# Altium PCB PCB1.PcbDoc
Units mm, origin at the board's own origin, x right, y up, seen from the top; angles counter-clockwise.
Board outline 178.5 x 80.5 mm, 2 copper layers (Top Layer, Bottom Layer); 17 components, 45 nets, 215 pads, 54 vias.
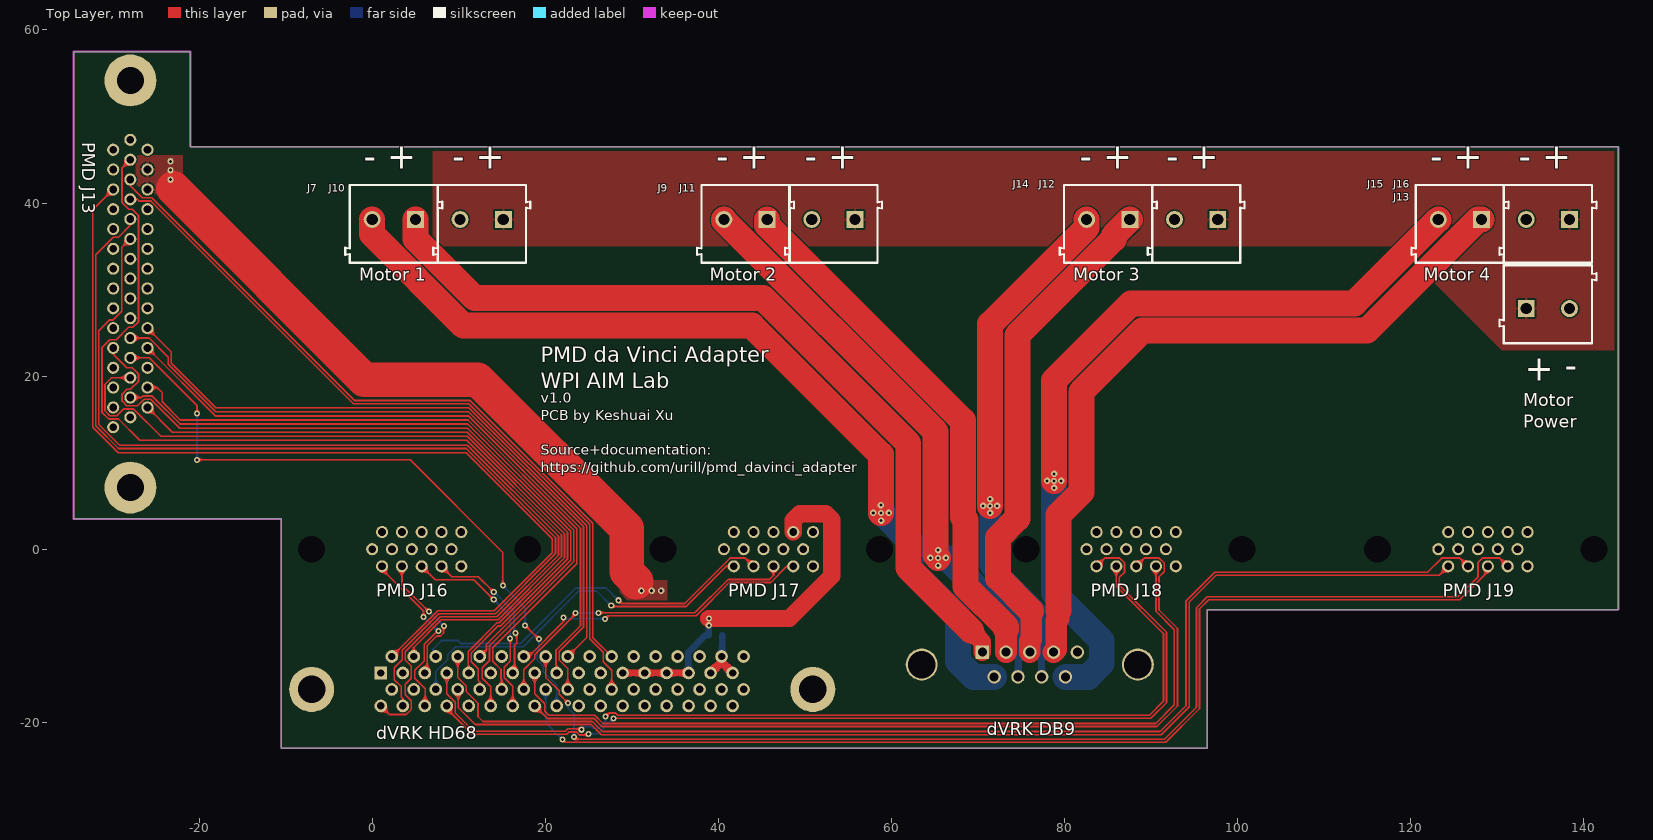
[diagram p0: Top Layer view]
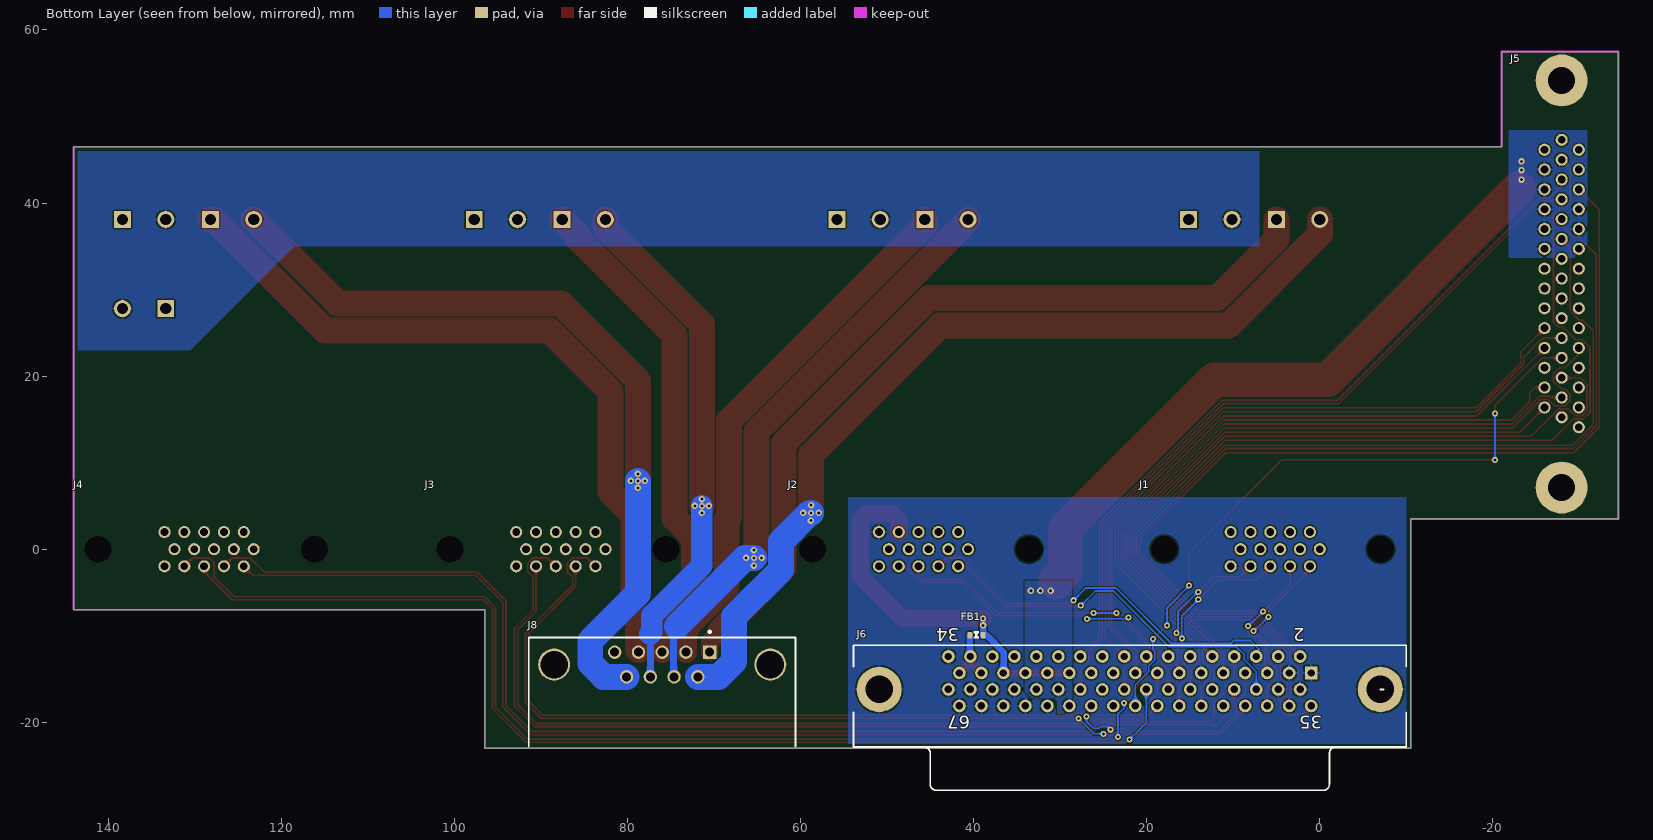
[diagram p1: Bottom Layer view, seen from below]
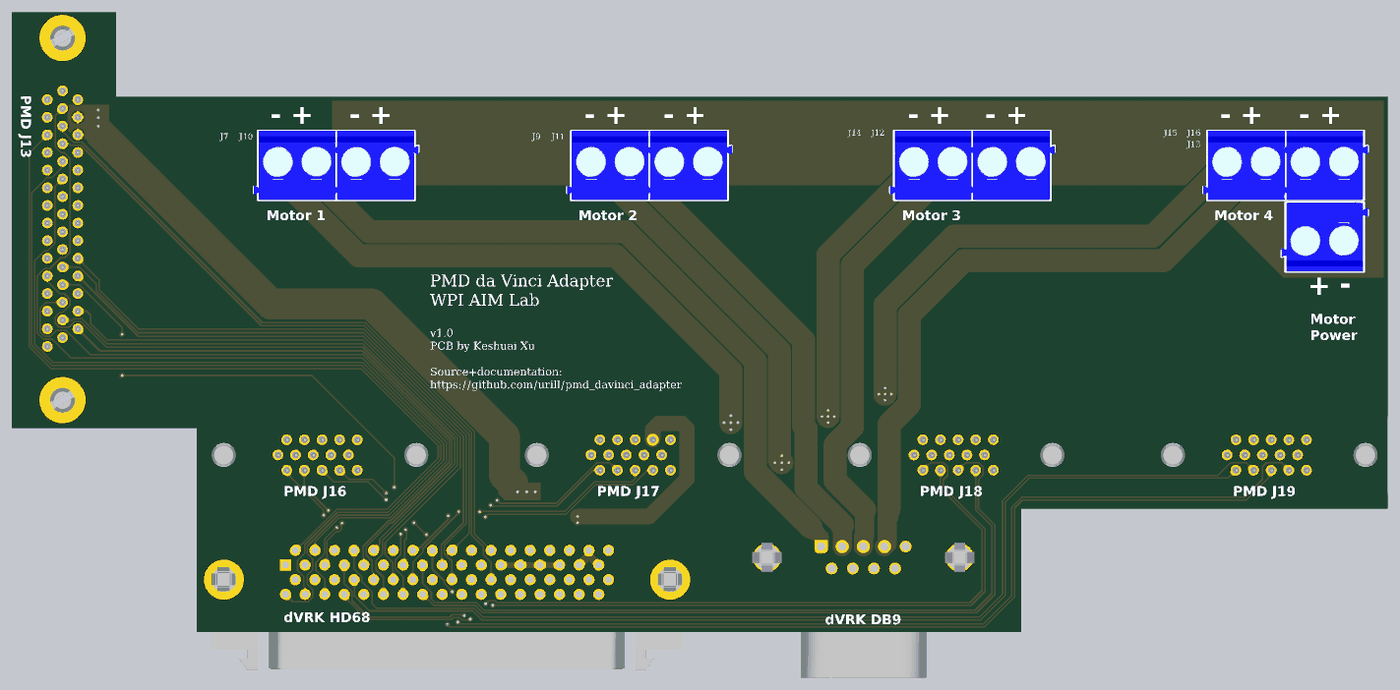
[diagram p2: 3D render of the assembled board from above, using the file's embedded part models]
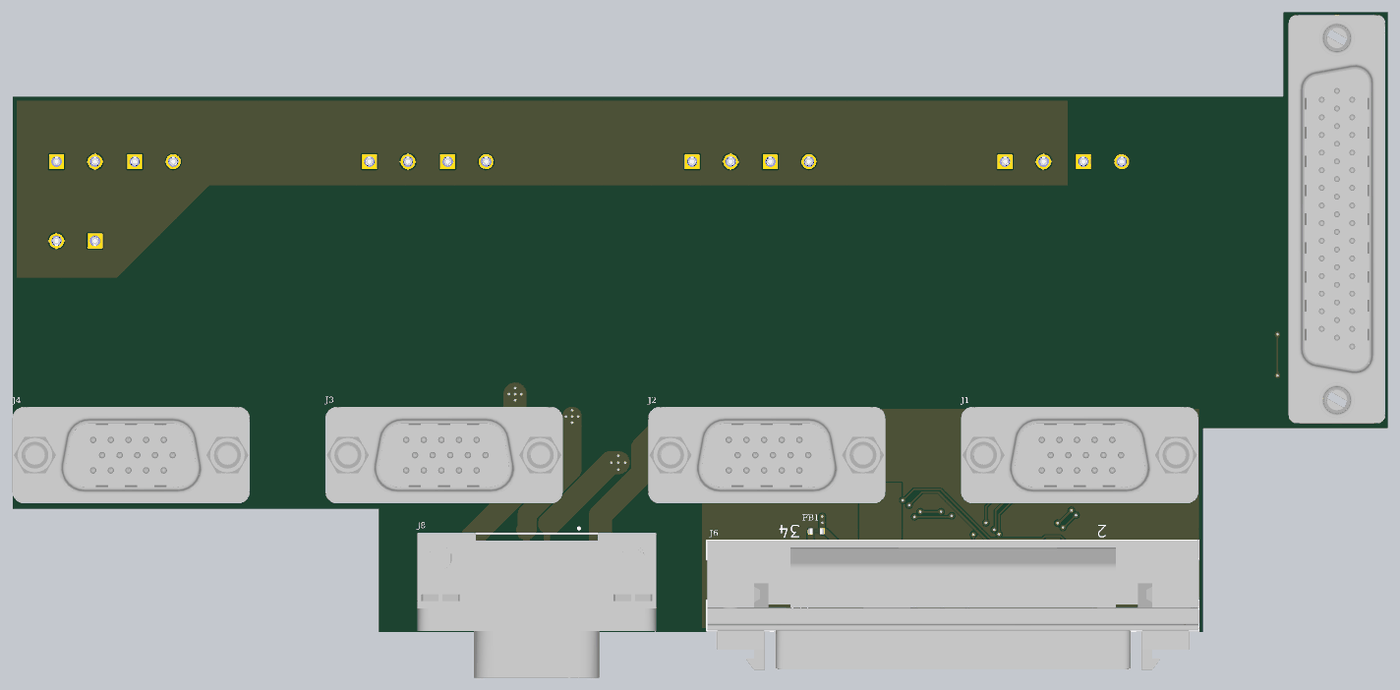
[diagram p3: 3D render of the assembled board from below, using the file's embedded part models]

## Layer stack, top to bottom
Top Solder: solder mask 0.0102, Solder Resist, Dk 3.5
Top Layer: signal copper 0.0356
Dielectric 1: dielectric 0.32, FR-4, Dk 4.8
Bottom Layer: signal copper 0.0356
Bottom Solder: solder mask 0.0102, Solder Resist, Dk 3.5

## Board outline
-34.5,3.5 -34.5,57.5 -21,57.5 -21,46.5 144,46.5 144,-7 96.5,-7 96.5,-23 -10.5,-23 -10.5,3.5

## Design rules (kind name [scope] priority, off if disabled: settings)
BoardOutlineClearance [InNetClass('All Nets')] p1: gap=0.381 ignorepadtopadclearanceinfootprint=FALSE
Clearance BoardEdge [All vs OnLayer('Keep-Out Layer')] p1: gap=0.4 ignorepadtopadclearanceinfootprint=FALSE
Clearance "Stitching GND" [IsStitchingVia and InNet('GND') vs (IsVia and (Not IsStitchingVia)) Or IsPad] p2 off: gap=0.127 ignorepadtopadclearanceinfootprint=FALSE except(0: Arc-Hole Track-Hole SMDPad-Hole THPad-Hole Via-Hole Fill-Hole Poly-Hole Region-Hole Text-Hole)
Clearance Clearance_outlinepolygon [inPolygon vs OnLayer('Keep-Out Layer')] p3 off: gap=0.4 ignorepadtopadclearanceinfootprint=FALSE except(0: Arc-Hole Track-Hole SMDPad-Hole THPad-Hole Via-Hole Fill-Hole Poly-Hole Region-Hole Text-Hole)
Clearance Clearance-polygonpolygon [InPolygon vs InPolygon] p4 off: gap=0.5 ignorepadtopadclearanceinfootprint=FALSE except(0: Arc-Hole Track-Hole SMDPad-Hole THPad-Hole Via-Hole Fill-Hole Poly-Hole Region-Hole Text-Hole)
Clearance Clearance_2 [All] p5: gap=0.152 ignorepadtopadclearanceinfootprint=FALSE except(0: Arc-Hole Track-Hole SMDPad-Hole THPad-Hole Via-Hole Fill-Hole Poly-Hole Region-Hole Text-Hole)
ComponentClearance [InComponentClass('no-clearance-check')] p1: gap=-999 collisioncheckmode=3 verticalgap=-999 showdistances=FALSE
ComponentClearance ComponentClearance_4 [All] p2: gap=0.254 collisioncheckmode=3 verticalgap=0.254 showdistances=FALSE
HoleSize [All] p1: absolutevalues=TRUE maxlimit=6 minlimit=0.33 maxpercent=80.000 minpercent=20.000
MinimumAnnularRing ignore [(HasFootprint('LMZ21701SIL') OR HasFootprint('m3 hole') OR HasFootprint('G3T-12AH'))] p1: minimumring=0
MinimumAnnularRing [All] p2: minimumring=0.152
MinimumSolderMaskSliver [All] p1: minsoldermaskwidth=0.076
NetAntennae [All] p1: netantennaetolerance=2
PolygonConnect PolygonConnect_heat [IsVia OR InPolygonClass('nothermalrelief') OR InPadClass('heatsink')] p1: connectstyle=Direct reliefconductorwidth=0.254 reliefentries=4 polygonreliefangle="90 Angle" airgapwidth=0.254
PolygonConnect [All] p2: connectstyle=Relief reliefconductorwidth=0.3 reliefentries=4 polygonreliefangle="90 Angle" airgapwidth=0.2
RoutingVias [All] p1: holewidth=0.35 width=0.7 viastyle="Through Hole" minholewidth=0.3 minwidth=0.7 maxholewidth=6 maxwidth=6 viatemplateguid#1={ECAECEE0-98E7-41BA-9EC3-9AF7EEB56C01} viatemplatename#1=signal
SilkToSilkClearance [All] p1 off: silktosilkclearance=0
SilkToSolderMaskClearance SilkToSolderMaskClearance_1 [HasFootprint('PAD-JUMPER-2-NO_YES_SILK')] p1: minsilkscreentomaskgap=0 clearancetoexposedcopper=TRUE
SilkToSolderMaskClearance [IsPad] p2: minsilkscreentomaskgap=0.15 clearancetoexposedcopper=TRUE
SolderMaskExpansion [All] p1: expansion=0.076
Width [All] p1: maxlimit=25.375 minlimit=0.152 preferedwidth=0.2
24 further rules are at their usual default settings.

## Classes and differential pairs
component class no-clearance-check: J7 J9 J10 J11 J12 J13 J14 J15

## Components (designator, comment, footprint, x,y, rotation, side; value= is the part's Value field where it differs from the comment)
FB1 "Ferrite Bead" IND_0603 39.675,-9.925 r180 bottom
J1 "DB15 connector vertical male" 10090928-P154XLF 5.475,0 r0 bottom locked
J2 "DB15 connector vertical male" 10090928-P154XLF 46.115,0 r0 bottom locked
J3 "DB15 connector vertical male" 10090928-P154XLF 88.025,0 r0 bottom locked
J4 "DB15 connector vertical male" 10090928-P154XLF 128.665,0 r0 bottom locked
J5 "DB44 connector vertical male" 10090928-P444XLF -27.94,30.64 r270 bottom locked
J6 "787928-7" 787928-7 21.955,-22.855 r0 bottom locked
J7 "691101710002" 691101710002 2.5,37.6 r180 top
J8 "5747844-4" TE-5747844-4_V 75.986,-13.322 r0 bottom locked
J9 "691101710002" 691101710002 43.14,37.6 r180 top
J10 "691101710002" 691101710002 12.66,37.6 r180 top
J11 "691101710002" 691101710002 53.3,37.6 r180 top
J12 "691101710002" 691101710002 95.21,37.6 r180 top
J13 "691101710002" 691101710002 135.85,28.3 r0 top
J14 "691101710002" 691101710002 85.05,37.6 r180 top
J15 "691101710002" 691101710002 125.69,37.6 r180 top
J16 "691101710002" 691101710002 135.85,37.6 r180 top

## Footprints (in the part's own frame and the unit in brackets; to place one, negate y for a bottom-side part, rotate by r counter-clockwise, add the part's x,y. Pads: shape width x height; smd on the part's side, far side on the other; paste and mask are expansions set on the pad)
787928-7 [mm] "Connector; D Subminiature 050 Series; 68 Position; Right Angle"
  rect 1.46x1.46 hole 0.86: 1(-20.955,-8.555)
  round 1.46 hole 0.86: 2(-19.685,-10.46) 3(-18.415,-8.555) 4(-17.145,-10.46) 5(-15.875,-8.555) 6(-14.605,-10.46) 7(-13.335,-8.555) 8(-12.065,-10.46) 9(-10.795,-8.555) 10(-9.525,-10.46) 11(-8.255,-8.555) 12(-6.985,-10.46) 13(-5.715,-8.555) 14(-4.445,-10.46) 15(-3.175,-8.555) 16(-1.905,-10.46) 17(-0.635,-8.555) 18(0.635,-10.46) 19(1.905,-8.555) 20(3.175,-10.46) 21(4.445,-8.555) 22(5.715,-10.46) 23(6.985,-8.555) 24(8.255,-10.46) 25(9.525,-8.555) 26(10.795,-10.46) 27(12.065,-8.555) 28(13.335,-10.46) 29(14.605,-8.555) 30(15.875,-10.46) 31(17.145,-8.555) 32(18.415,-10.46) 33(19.685,-8.555) 34(20.955,-10.46) 35(-20.955,-4.745) 36(-19.685,-6.65) 37(-18.415,-4.745) 38(-17.145,-6.65) 39(-15.875,-4.745) 40(-14.605,-6.65) 41(-13.335,-4.745) 42(-12.065,-6.65) 43(-10.795,-4.745) 44(-9.525,-6.65) 45(-8.255,-4.745) 46(-6.985,-6.65) 47(-5.715,-4.745) 48(-4.445,-6.65) 49(-3.175,-4.745) 50(-1.905,-6.65) 51(-0.635,-4.745) 52(0.635,-6.65) 53(1.905,-4.745) 54(3.175,-6.65) 55(4.445,-4.745) 56(5.715,-6.65) 57(6.985,-4.745) 58(8.255,-6.65) 59(9.525,-4.745) 60(10.795,-6.65) 61(12.065,-4.745) 62(13.335,-6.65) 63(14.605,-4.745) 64(15.875,-6.65) 65(17.145,-4.745) 66(18.415,-6.65) 67(19.685,-4.745) 68(20.955,-6.65)
  round 5.2 hole 3.18: 69(-28.955,-6.65) 70(28.955,-6.65)
  silkscreen extent -31.94,-11.76 31.94,5, body extent -31.99,-11.79 31.89,5.08, height 10.24
10090928-P154XLF [mm]
  round 0 hole 3.1 unplated: 0(-12.495,0) 0(12.495,0)
  round 1.4 hole 0.9: 1(-4.33,1.98) 2(-2.04,1.98) 3(0.25,1.98) 4(2.54,1.98) 5(4.83,1.98) 6(-5.475,0) 7(-3.185,0) 8(-0.895,0) 9(1.395,0) 10(3.685,0) 11(-4.33,-1.98) 12(-2.04,-1.98) 13(0.25,-1.98) 14(2.54,-1.98) 15(4.83,-1.98)
  body extent -15.42,-6.25 15.4,6.3, height 12.05
10090928-P444XLF [mm]
  round 6 hole 3.1: 0(-23.52,0) 0(23.52,0)
  round 1.4 hole 0.9: 1(-15.515,1.98) 2(-13.225,1.98) 3(-10.935,1.98) 4(-8.645,1.98) 5(-6.355,1.98) 6(-4.065,1.98) 7(-1.775,1.98) 8(0.515,1.98) 9(2.805,1.98) 10(5.095,1.98) 11(7.385,1.98) 12(9.675,1.98) 13(11.965,1.98) 14(14.255,1.98) 15(16.545,1.98) 16(-16.66,0) 17(-14.37,0) 18(-12.08,0) 19(-9.79,0) 20(-7.5,0) 21(-5.21,0) 22(-2.92,0) 23(-0.63,0) 24(1.66,0) 25(3.95,0) 26(6.24,0) 27(8.53,0) 28(10.82,0) 29(13.11,0) 30(15.4,0) 31(-15.515,-1.98) 32(-13.225,-1.98) 33(-10.935,-1.98) 34(-8.645,-1.98) 35(-6.355,-1.98) 36(-4.065,-1.98) 37(-1.775,-1.98) 38(0.515,-1.98) 39(2.805,-1.98) 40(5.095,-1.98) 41(7.385,-1.98) 42(9.675,-1.98) 43(11.965,-1.98) 44(14.255,-1.98)
  body extent -26.49,-6.28 26.51,6.27, height 11.85
691101710002 [mm] "5,00mm - modular - blue - Horizontal entry with pressure clamp - 12,6mm height - 02p"
  rect 1.95x1.95 hole 1.3: 1(-2.5,-0.5)
  round 1.95 hole 1.3: 2(2.5,-0.5)
  silkscreen extent -5.6,-4.5 5.6,4.5, body extent -5.6,-4.5 5.6,4.5, height 12.65
IND_0603 [mil]
  rrect50% 22x30 smd: 1(-30,0) 2(30,0)
  silkscreen extent -10,-15 10,15, body extent -31,-16 31,16, height 31
TE-5747844-4_V [mil] "TH, 9-Leads, Body 30.81x18.796mm, Pitch 1.3716mm"
  rect 61.02x61.02 hole 41: 1(-216,-56)
  round 61.02 hole 41: 2(-108,-56) 3(0,-56) 4(108,-56) 5(216,-56) 6(-162,56) 7(-54,56) 8(54,56) 9(162,56)
  round 144.69 hole 125: MH1(-492,0) MH2(492,0)
  silkscreen extent -606,-153 607,374, body extent -610,-125 610,618, height 494

## Part data
FB1: library part "Ferrite Chip", "SMT Ferrite Chip"
J1 J2 J3 J4: library part PMD-sensor
J5: library part PMD-GPIO
J6: "Receptacle Assembly, Shielded, Right Angle, AMPLIMITE", PackageDocument=13-Jan-2000, ComponentLink1Description="Manufacturer Link", ComponentLink1URL=http://www.tycoelectronics.com/, ComponentLink2Description="Packaging Specification", ComponentLink2URL=http://ecommas.tycoelectronics.com/commerce/DocumentDelivery/DDEController?Action=showdoc&DocId=Customer+Drawing%7F787928%7FE%7Fpdf%7FEnglish%7FENG_CD_787928_E.pdf, ComponentLink3Description="URL Link1", ComponentLink3URL=http://catalog.tycoelectronics.com/TE/docs/cadgeo/2/25/41522.tar.gz, DatasheetDocument=13-Jan-2000, DrillSize="Corresponds to nominal value.", Gender="Receptacle Header", Note="Series III", Orientation="Right Angle", PackageReference=787928-7, PCB_Layout="Complies with manufacturer's recommendation.", Positions=68, Published=17-Jul-2002, Publisher="Altium Limited"
J7 J9 J10 J11 J12 J13 J14 J15 J16: "WR-TBL Serie 101 - 5.00 mm Horizontal Entry Modular, 02p", ComponentLink1Description=Manufacturer, ComponentLink1URL=http://www.we-online.de, ComponentLink2Description=Datasheet, ComponentLink2URL=http://katalog.we-online.de/em/datasheet/6911017100xx.pdf, Part Number=691101710002, Pin Number=02p, Pitch="5 mm", Published Date="Feb. 2017", Publisher="Wurth Elektronik"
  J7 J9 J10 J11 J12 J13 J14 J15: ClassName=no-clearance-check
  J16: ComponentClass=no-clearance-check
J8: library part CMP-1684-00001-6, "Female D-Sub Receptacle, Pitch 1.3716 mm, 9 Position, Height 12.9286 mm, -55 to 105 degC, RoHS, Tray", Colour=Black, Current Rating="6 A", Manufacturer="TE Connectivity", Max Operating Temperature="105 degC", Min Operating Temperature="-55 degC", Package Quantity=130, Voltage Rating="125 V", ComponentLink1Description="Manufacturer URL", ComponentLink1URL=http://www.te.com/, ComponentLink2Description=Datasheet, ComponentLink2URL=http://www.te.com/commerce/DocumentDelivery/DDEController?Action=srchrtrv&DocNm=5747844&DocType=Customer+Drawing&DocLang=English, Contact Finish=Gold, Contact Material=Bronze, Contact Plating=Gold, DatasheetVersion="Rev. P, 03/2011", Height="12.54 mm", Lead Pitch="2.74 mm", Length="30.81 mm", Mount="Through Hole", Mounting Technology="Through Hole", PackageDescription="Female D-Sub Receptacle, Pitch 1.3716 mm, 9 Position, Height 12.9286 mm", PackageReference=5747844-4, Packaging=Tray, Pins=9, REACH SVHC="No SVHC", RoHSCompliant=true, Rows=2

## Via types
v1: diameter 0.7, hole 0.35, Top Layer to Bottom Layer, tented both sides, 31 vias
v2: diameter 0.75, hole 0.35, Top Layer to Bottom Layer, tented both sides, 23 vias

## Nets (pads, with @x,y where several pads share a name; then routed paths per layer and width w, separated by ;. In a path a pad name is that pad's centre, name@x,y a point inside that pad or via, vN(x,y) a via of type N, cw(c..) or ccw(c..) an arc to the next point about the centre after c; other vN are vias at no path point)
AGND: J5.4 J5.5 J5.32 J5.33 J5.34 J5.35 J5.36 J6.57 J6.58 J6.60 | length 75.3
  Top Layer w4: -23,41.7 -0.9,19.6 12.2,19.6 29.4,2.4 29.4,-2.6 30.5,-3.7 30.5,-3.8
  other v2: 31.1,-4.8 32.3,-4.8 33.4,-4.8 -23.3,42.7 -23.3,43.8 -23.3,44.8
ENCA+1: J1.1 J6.39 | length 20.6
  Top Layer w0.2: J1.1 1.145,-2.345 5.925,-7.125 5.925,-7.8 v1(5.95,-7.825) ; J6.39 6.125,-18.065 6.125,-16.131 4.925,-14.931 4.925,-14 6.015,-12.91 6.015,-10.986 7.577,-9.425 v1(7.65,-9.425)
  Bottom Layer w0.2: v1(5.95,-7.825) 7.55,-9.425 v1(7.65,-9.425)
ENCA+2: J2.1 J6.40 | length 43.4
  Top Layer w0.2: v1(27.625,-6.525) 27.727,-6.627 36.248,-6.627 40.895,-1.98 J2.1
  Bottom Layer w0.2: J6.40 7.35,-14.125 8.725,-12.75 8.725,-12.171 9.639,-11.257 17.443,-11.257 23.875,-4.825 25.925,-4.825 v1(27.625,-6.525)
ENCA+3: J3.1 J6.41 | length 109
  Top Layer w0.2: J6.41 8.62,-18.448 11.56,-21.387 22.489,-21.387 22.766,-21.11 23.585,-21.11 23.935,-21.461 24.841,-21.461 v1(24.974,-21.327) ; v1(27.892,-19.536) 27.894,-19.538 89.96,-19.538 91.775,-17.724 91.775,-9.589 86.337,-4.152 86.337,-3.247 86.937,-2.647 86.937,-1.586 86.379,-1.028 84.647,-1.028 J3.1
  Bottom Layer w0.2: v1(24.974,-21.327) 26.101,-21.327 v1(27.892,-19.536)
ENCA+4: J4.1 J6.42 | length 132.9
  Top Layer w0.2: J6.42 9.955,-16.27 9.955,-18.294 11.916,-20.256 25.295,-20.256 26.467,-21.427 91.173,-21.427 94.4,-18.2 94.4,-6.1 97.5,-3 123.315,-3 J4.1
ENCA-1: J1.2 J6.5 | length 15.7
  Top Layer w0.2: J1.2 3.435,-4.085 v1(6.55,-7.2) ; J6.5 6.368,-14.012 6.368,-11.132 7.473,-10.027 7.9,-10.027 8.252,-9.675 8.252,-9.175 8.126,-9.049 v1(8.325,-8.85)
  Bottom Layer w0.2: v1(6.55,-7.2) 8.2,-8.85 v1(8.325,-8.85)
ENCA-2: J2.2 J6.6 | length 44.6
  Top Layer w0.2: v1(28.45,-5.9) 28.825,-6.275 36.102,-6.275 41.349,-1.028 43.123,-1.028 J2.2
  Bottom Layer w0.2: J6.6 7.35,-11.95 6.986,-11.586 8.021,-10.55 9.95,-10.55 10.305,-10.905 17.12,-10.905 23.552,-4.473 27.023,-4.473 v1(28.45,-5.9)
ENCA-3: J3.2 J6.7 | length 107.8
  Top Layer w0.2: J6.7 8.62,-16.721 9.602,-17.703 9.602,-18.932 11.706,-21.035 22.343,-21.035 22.62,-20.758 24.084,-20.758 v1(24.184,-20.858) ; v1(26.974,-19.327) 27.366,-18.934 28.142,-18.934 28.394,-19.186 89.814,-19.186 91.422,-17.578 91.422,-9.735 85.985,-4.298 J3.2
  Bottom Layer w0.2: v1(24.184,-20.858) 24.209,-20.858 24.587,-20.479 25.297,-20.479 25.514,-20.697 26.151,-20.697 26.974,-19.875 v1(26.974,-19.327)
ENCA-4: J4.2 J6.8 | length 138.8
  Top Layer w0.2: J6.8 9.89,-14.816 10.872,-15.798 10.872,-16.433 12.234,-17.794 12.234,-19.33 12.807,-19.903 25.441,-19.903 26.613,-21.075 91.027,-21.075 94.048,-18.054 94.048,-5.952 97.352,-2.648 121.946,-2.648 123.566,-1.028 125.673,-1.028 J4.2
ENCB+1: J1.3 J6.47 | length 23.9
  Top Layer w0.2: J1.3@5.944,-1.98 J1.3 7.27,-3.525 11.75,-3.525 v1(14.05,-5.825) ; v1(15.952,-10.302) 15.952,-12.923 15.25,-13.625 15.25,-14.85 16.24,-15.84 J6.47
  Bottom Layer w0.2: v1(14.05,-5.825) 15.952,-7.727 v1(15.952,-10.302)
ENCB+2: J2.3 J6.48 | length 37
  Top Layer w0.2: J6.48 17.51,-13.915 18.8,-12.625 18.8,-12.175 23.475,-7.5 v1(23.475,-7.375) ; v1(26.175,-7.375) 26.202,-7.348 37.283,-7.348 41.13,-3.5 45.902,-3.5 46.365,-3.037 J2.3
  Bottom Layer w0.2: v1(23.475,-7.375) v1(26.175,-7.375)
ENCB+3: J3.3 J6.49 | length 97.8
  Top Layer w0.2: J6.49 20.221,-19.551 25.587,-19.551 26.527,-20.491 90.67,-20.491 93.047,-18.114 93.047,-9.154 90.917,-7.024 90.917,-3.194 91.517,-2.594 91.517,-1.586 90.959,-1.028 89.227,-1.028 J3.3
ENCB+4: J4.3 J6.50 | length 129.6
  Top Layer w0.2: J6.50 J6.50@20.28,-16.435 ; v1(22,-22) 22.315,-22.315 91.685,-22.315 95.6,-18.4 95.6,-6.9 96.648,-5.852 125.648,-5.852 128.915,-2.585 J4.3
  Bottom Layer w0.2: J6.50@20.121,-16.276 J6.50 20.05,-20.05 v1(22,-22)
ENCB-1: J1.4 J6.13 | length 17.9
  Top Layer w0.2: J1.4 9.208,-3.173 12.273,-3.173 v1(14.051,-4.95) ; J6.13 16.452,-14.088 16.452,-11.1 16.702,-10.85 16.702,-9.827 v1(16.576,-9.7)
  Bottom Layer w0.2: v1(14.051,-4.95) 14.126,-4.95 16.4,-7.225 16.4,-9.525 v1(16.576,-9.7)
ENCB-2: J2.4 J6.14 | length 35.9
  Top Layer w0.2: J6.14 18.082,-12.395 22.1,-8.377 v1(22.1,-7.9) ; v1(26.925,-8.05) 27.275,-7.7 37.429,-7.7 41.276,-3.852 46.048,-3.852 47.92,-1.98 J2.4
  Bottom Layer w0.2: v1(22.1,-7.9) 22.25,-8.05 v1(26.925,-8.05)
ENCB-3: J3.4 J6.15 | length 96
  Top Layer w0.2: J6.15 18.78,-16.721 19.928,-17.869 19.928,-18.742 20.384,-19.199 25.733,-19.199 26.673,-20.139 90.524,-20.139 92.685,-17.978 92.685,-9.29 90.565,-7.17 J3.4
ENCB-4: J4.4 J6.16 | length 135.4
  Top Layer w0.2: J6.16 20.05,-14.816 21.608,-16.373 21.608,-16.745 v1(22.628,-17.765) ; v1(23.335,-21.713) 23.572,-21.95 91.552,-21.95 95.248,-18.254 95.248,-6.752 96.5,-5.5 125.45,-5.5 127.782,-3.168 127.782,-1.518 128.272,-1.028 130.253,-1.028 J4.4
  Bottom Layer w0.2: v1(22.628,-17.765) 22.628,-18.374 23.335,-19.081 v1(23.335,-21.713)
ENCI+4: J5.19 J6.56 | length 88.8
  Top Layer w0.2: J5.19 -27.122,40.43 -26.929,40.237 -25.566,40.237 -2.151,16.823 11.179,16.823 25.135,2.867 25.135,-10.358 26.688,-11.911 26.688,-13 27.67,-13.982 J6.56
ENCI-4: J5.18 J6.22 | length 86.6
  Top Layer w0.2: J5.18 -27.94,41.992 -26.57,40.623 -25.452,40.623 -22.5,37.67 -2.005,17.175 11.325,17.175 25.487,3.013 25.487,-10.212 J6.22
GND: J2.15 J6.1 J6.3 J6.34 J6.36 J6.38 J6.59 J6.61 J6.62 J6.63 J6.64 J6.65 J6.66 J6.67 J6.68 J6.69 J6.70
GND_MOTOR: J10.2 J11.2 J12.2 J13.2 J16.2
HOME1: J5.41 J6.17 | length 76.6
  Top Layer w0.2: J5.41 -18.108,15.403 11.103,15.403 24.077,2.429 24.077,-8.823 21.255,-11.645 21.255,-13.373 21.32,-13.438 J6.17
HOME2: J5.40 J6.18 | length 77
  Top Layer w0.2: J5.40 -23.205,22.79 -23.205,21.497 -18.054,16.346 11.157,16.346 24.782,2.721 24.782,-10.203 J6.18
HOME3: J5.27 J6.51 | length 76.6
  Top Layer w0.2: J5.27 -25.758,22.11 -20.225,16.577 v1(-20.225,15.675) ; v1(-20.225,10.325) 4.4,10.325 15.1,-0.375 v1(15.1,-4.2) ; v1(17.65,-8.825) 17.7,-8.825 19.225,-10.35 v1(19.275,-10.35)
  Bottom Layer w0.2: v1(-20.225,10.325) v1(-20.225,15.675) ; v1(15.1,-4.2) 17.65,-6.75 v1(17.65,-8.825) ; v1(19.275,-10.35) 19.275,-11.54 19.068,-11.747 19.068,-12.802 19.762,-13.497 19.762,-14.132 21.32,-15.689 J6.51
HOME4: J5.26 J6.52 | length 82.3
  Top Layer w0.2: J5.26 -25.758,24.4 -23.557,22.199 -23.557,21.351 -18.081,15.875 11.13,15.875 24.43,2.575 24.43,-8.969 21.608,-11.791 21.608,-12.802 22.59,-13.784 J6.52
MOTOR+1: J7.1 J8.1 | length 96.7
  Top Layer w2: 69.2,-9.4 70.5,-10.7 J8.1
  Top Layer w3: J7.1 5,35.858 11.858,29 45.184,29 61.943,12.241 61.943,-2.143 69.2,-9.4
MOTOR+2: J8.2 J9.1 | length 61.4
  Top Layer w2.5: J8.2 73.243,-9.243
  Top Layer w3: J9.1 45.64,37.46 68.248,14.852 68.248,3.694 68.552,3.389 68.552,-4.294 73.243,-8.985 73.243,-9.243
MOTOR+3: J8.3 J14.1 | length 58
  Top Layer w2.5: J8.3 75.986,-10.605 76.146,-10.445 76.146,-7.141
  Top Layer w3: 76.146,-7.141 72.328,-3.323 72.328,1.326 74.552,3.551 74.552,24.694 85.702,35.844 85.702,36.252 J14.1
MOTOR+4: J8.4 J15.1 | length 85.9
  Top Layer w2.5: J8.4 79.048,-11.582 79.048,-8.252 79.3,-8 79.3,-7.1
  Top Layer w3: 79.3,-7.1 79.3,3.942 81.952,6.594 81.952,18.194 89.006,25.248 114.948,25.248 127.8,38.1 J15.1
MOTOR-1: J7.2 J8.6 | length 103.6
  Top Layer w3: J7.2 0,36.4 10.552,25.848 43.878,25.848 58.79,10.935 v2(58.79,5.1) v1(58.79,4.2)
  Bottom Layer w3: v1(58.79,4.2) 58.939,4.2 62.248,0.891 62.248,-2.348 67.7,-7.8 67.7,-12.987 69.458,-14.745 J8.6
  other v2: 58.8,3.3 57.9,4.2 59.7,4.2
MOTOR-2: J8.7 J9.2 | length 67.5
  Top Layer w3: J9.2 40.64,38.002 65.095,13.547 65.095,-0.695 v1(65.4,-1)
  Bottom Layer w0.8: 74.3,-8.9 74.659,-9.259 74.659,-14.701 J8.7
  Bottom Layer w3: v1(65.4,-1) v2(66.3,-1) 66.4,-1 74.3,-8.9
  other v2: 65.4,-1.9 64.5,-1 65.4,-0.1
MOTOR-3: J8.8 J14.2 | length 60
  Top Layer w3: v1(71.4,5) v2(71.4,5.8) 71.4,26 82.55,37.15 J14.2
  Bottom Layer w0.8: J8.8 77.358,-9.842 77.4,-9.8
  Bottom Layer w2.5: v1(71.4,5) v2(71.4,4.2) 71.4,-1.895 77.202,-7.698 77.202,-9.602 77.4,-9.8
  other v2: 70.6,5 72.2,5
MOTOR-4: J8.9 J15.2 | length 91.9
  Top Layer w3: v1(78.8,7.9) v2(78.8,8.7) 78.8,19.5 87.7,28.4 113.49,28.4 J15.2
  Bottom Layer w3: v1(78.8,7.9) v2(78.8,7.1) 78.8,-5.1 84.3,-10.6 84.3,-13.2 82.755,-14.745 J8.9
  other v2: 78,7.9 79.6,7.9
NEGLIM3: J5.29 J6.45 | length 82.8
  Top Layer w0.2: J5.29 -26.66,17.53 -26.5,17.69 -25.42,17.69 -22.19,14.461 11.049,14.461 23.286,2.224 23.286,-1.414 13.571,-11.128 13.571,-12.841 12.718,-13.695 12.718,-14.905 13.7,-15.887 J6.45
NEGLIM4: J5.43 J6.46 | length 80
  Top Layer w0.2: J5.43 -24.829,18.675 -24.262,18.108 -24.262,17.031 -22.163,14.932 11.076,14.932 23.638,2.37 23.638,-1.662 13.924,-11.376 13.924,-12.931 14.89,-13.897 14.89,-15.011 14.97,-15.091 J6.46
NetFB1_1: FB1.1 J6.31 J6.32 J6.33 | length 6.7
  Top Layer w1: J6.31 J6.32@40.37,-13.03 ; J6.32 J6.32@40.37,-13.03 ; J6.33 J6.32@40.37,-13.03
  Bottom Layer w0.75: J6.32 40.437,-12.328 FB1.1
POSLIM1: J5.28 J6.9 | length 86.8
  Top Layer w0.2: J5.28 -30.122,19.82 -30.872,19.069 -30.872,15.991 -30.314,15.433 -29.526,15.433 -28.766,16.192 -27.546,16.192 -24.4,13.047 10.968,13.047 22.228,1.786 22.228,-0.976 14.693,-8.512 14.425,-8.512 11.095,-11.842 11.095,-13.373 11.16,-13.438 J6.9
POSLIM2: J5.11 J6.10 | length 86.2
  Top Layer w0.2: J5.11 -29.92,22.527 -28.357,20.965 -27.738,20.965 -26.988,20.214 -26.988,19.426 -27.931,18.482 -28.334,18.482 -28.892,17.924 -28.892,17.136 -28.334,16.578 -27.114,16.578 -26.354,17.337 -25.566,17.337 -22.217,13.989 11.022,13.989 22.933,2.078 22.933,-1.268 13.219,-10.982 13.219,-11.606 J6.10
POSLIM4: J5.44 J6.44 | length 77.8
  Top Layer w0.2: J5.44 -23.093,13.518 10.995,13.518 22.581,1.932 22.581,-1.122 14.839,-8.864 14.571,-8.864 11.448,-11.988 11.448,-13 12.25,-13.802 12.25,-15.162 12.43,-15.343 J6.44
POT1: J5.21 J6.35 | length 117.8
  Top Layer w0.2: J5.21 -28.93,34.86 -28.93,27.478 -29.911,26.497 -30.314,26.497 -31.577,25.235 -31.577,14.405 -29.195,12.023 10.995,12.023 21.524,1.494 21.524,-0.684 14.403,-7.805 7.857,-7.805 3.828,-11.834 3.828,-12.802 4.522,-13.497 4.522,-14.905 3.828,-15.6 3.828,-16.81 4.522,-17.505 4.522,-18.517 3.947,-19.092 1.982,-19.092 J6.35
POT2: J5.3 J6.2 | length 112
  Top Layer w0.2: J5.3 -32.282,39.213 -32.282,14.113 -29.33,11.161 10.86,11.161 20.819,1.202 20.819,-0.392 14.111,-7.1 7.565,-7.1 J6.2
POT3: J5.20 J6.37 | length 115.8
  Top Layer w0.2: J5.20 -27.94,37.412 -29.31,36.043 -29.929,36.043 -31.93,34.042 -31.93,14.259 -29.303,11.633 10.887,11.633 21.171,1.348 21.171,-0.538 14.257,-7.452 7.711,-7.452 3.475,-11.688 3.475,-12.777 2.558,-13.695 2.558,-15.063 3.36,-15.865 3.36,-17.067 3.54,-17.248 J6.37
POT4: J5.17 J6.4 | length 117
  Top Layer w0.2: J5.17 -28.892,44.058 -28.892,40.036 -28.142,39.285 -27.738,39.285 -26.988,38.534 -26.988,26.296 -27.643,25.64 -28.155,25.64 -29.587,24.207 -30.314,24.207 -31.225,23.297 -31.225,15.845 -30.428,15.047 -29.31,15.047 -26.838,12.575 10.941,12.575 21.876,1.64 21.876,-0.83 14.549,-8.157 8.003,-8.157 4.81,-11.35 J6.4
VCC: FB1.2 J2.14 J6.23 J6.25 J6.27 J6.29 | length 44.3
  Top Layer w0.75: J6.23 J6.25 J6.27 J6.29
  Top Layer w2: v1(38.9,-8) 48.2,-8 53.1,-3.1 53.1,3.4 52.4,4.1 49.4,4.1 48.655,3.355 J2.14
  Bottom Layer w0.75: J6.29 36.547,-14.287 36.547,-11.899 38.522,-9.925 FB1.2 38.913,-8.013 v1(38.9,-8)
  other v2: 38.9,-8.8
VCC_MOTOR: J10.1 J11.1 J12.1 J13.1 J16.1
pads on no net: J1.0 J1.5 J1.6 J1.7 J1.8 J1.9 J1.10 J1.11 J1.12 J1.13 J1.14 J1.15 J2.0 J2.5 J2.6 J2.7 J2.8 J2.9 J2.10 J2.11 J2.12 J2.13 J3.0 J3.5 J3.6 J3.7 J3.8 J3.9 J3.10 J3.11 J3.12 J3.13 J3.14 J3.15 J4.0 J4.5 J4.6 J4.7 J4.8 J4.9 J4.10 J4.11 J4.12 J4.13 J4.14 J4.15 J5.0 J5.1 J5.2 J5.6 J5.7 J5.8 J5.9 J5.10 J5.12 J5.13 J5.14 J5.15 J5.16 J5.22 J5.23 J5.24 J5.25 J5.30 J5.31 J5.37 J5.38 J5.39 J5.42 J6.11 J6.12 J6.19 J6.20 J6.21 J6.24 J6.26 J6.28 J6.30 J6.43 J6.53 J6.54 J6.55 J8.5 J8.MH1 J8.MH2

## Polygon pours and split planes (outlines as drawn)
GND on Bottom Layer "GND_L02_P012" (solid, pour order 12): -10,-22.5 54.5,-22.5 54.5,6 -10,6
GND_MOTOR on Bottom Layer "GND_MOTOR_L02_P010" (solid, pour order 10): 7,46 7,35 118.5,35 130.5,23 143.5,23 143.5,46
AGND on Bottom Layer "AGND_L02_P002" (solid, pour order 2): -30.9,48.4 -30.9,35.2 -29.4,33.7 -21.8,33.7 -21.8,48.4
AGND on Bottom Layer "AGND_L02_P000" (solid, pour order 0): 28.6,-19 30.325,-19 30.325,-17.6 30.7,-17.225 33.3,-17.225 34.1,-16.425 34.1,-3.5 33.975,-3.625 28.6,-3.625
VCC_MOTOR on Top Layer "VCC_MOTOR_L01_P008" (solid, pour order 8): 7,46 7,35 118.5,35 130.5,23 143.5,23 143.5,46
AGND on Top Layer "AGND_L01_P006" (solid, pour order 6): 34.1,-3.6 28.6,-3.6 28.6,-5 29.5,-5.9 34.1,-5.9
AGND on Top Layer "AGND_L01_P004" (solid, pour order 4): -27.3,45.5 -27.3,42.2 -26.1,41 -21.9,41 -21.9,45.5

## Keep-outs
Keep-Out Layer:
  lines w0.2: -34.5,3.5 -10.5,3.5 -10.5,-23 96.5,-23 96.5,-7 144,-7 144,40.3 144,46.5 -21,46.5 -21,57.5 -34.5,57.5 -34.5,3.5

## Silkscreen, mask and mechanical layers (free items; w line width, h text height)
Top Overlay:
  text "PMD J13" at -34,47 h2.5 r270
  text "- +" at -1,43 h5
  text "- +" at 9.25,43 h5
  text "- +" at 39.75,43 h5
  text "- +" at 50,43 h5
  text "- +" at 81.75,43 h5
  text "- +" at 91.75,43 h5
  text "- +" at 122.25,43 h5
  text "- +" at 132.5,43 h5
  text "Motor 1" at -1.5,30.5 h2.5
  text "Motor 2" at 39,30.5 h2.5
  text "Motor 3" at 81,30.5 h2.5
  text "Motor 4" at 121.5,30.5 h2.5
  text "- +" at 139.25,23 h5 r180
  text "PMD da Vinci Adapter / WPI AIM Lab" at 19.5,18 h3
  text "Motor / Power" at 133,13.5 h2.5
  text "v1.0 / PCB by Keshuai Xu /  / Source+documentation: / https://github.com/urill/pmd_davinci_adapter" at 19.5,8.5 h2
  text "PMD J16" at 0.5,-6 h2.5
  text "PMD J17" at 41.14,-6 h2.5
  text "PMD J18" at 83.05,-6 h2.5
  text "PMD J19" at 123.69,-6 h2.5
  text "dVRK DB9" at 71,-22 h2.5
  text "dVRK HD68" at 0.5,-22.5 h2.5

## Dimensions
0,0 to 40.64,0 on Mechanical 15
40.64,0 to 82.55,0 on Mechanical 15
82.55,0 to 123.19,0 on Mechanical 15
0,0 to -27.94,15.24 on Mechanical 15
0,0 to -27.94,15.24 on Mechanical 15

## Text inside footprints (layer, text, board x,y; h text height)
J6: Bottom Overlay "67" at 40.39,-19.215 h1.5 r180; Bottom Overlay "35" at -0.25,-19.215 h1.5 r180; Bottom Overlay "34" at 41.66,-9.12 h1.5 r180; Bottom Overlay "2" at 1.77,-9.12 h1.5 r180